# Altium PCB MB1137.PcbDoc (part 4 of 4)
Units mm, origin at the board's own origin, x right, y up, seen from the top; angles counter-clockwise.
Board outline 70.13 x 133.47 mm, 6 copper layers (Top Layer, GND, Signal, PWR, GND (Mid2), Bottom Layer), stack 1.893 mm thick; 293 components, 281 nets, 1134 pads, 921 vias.
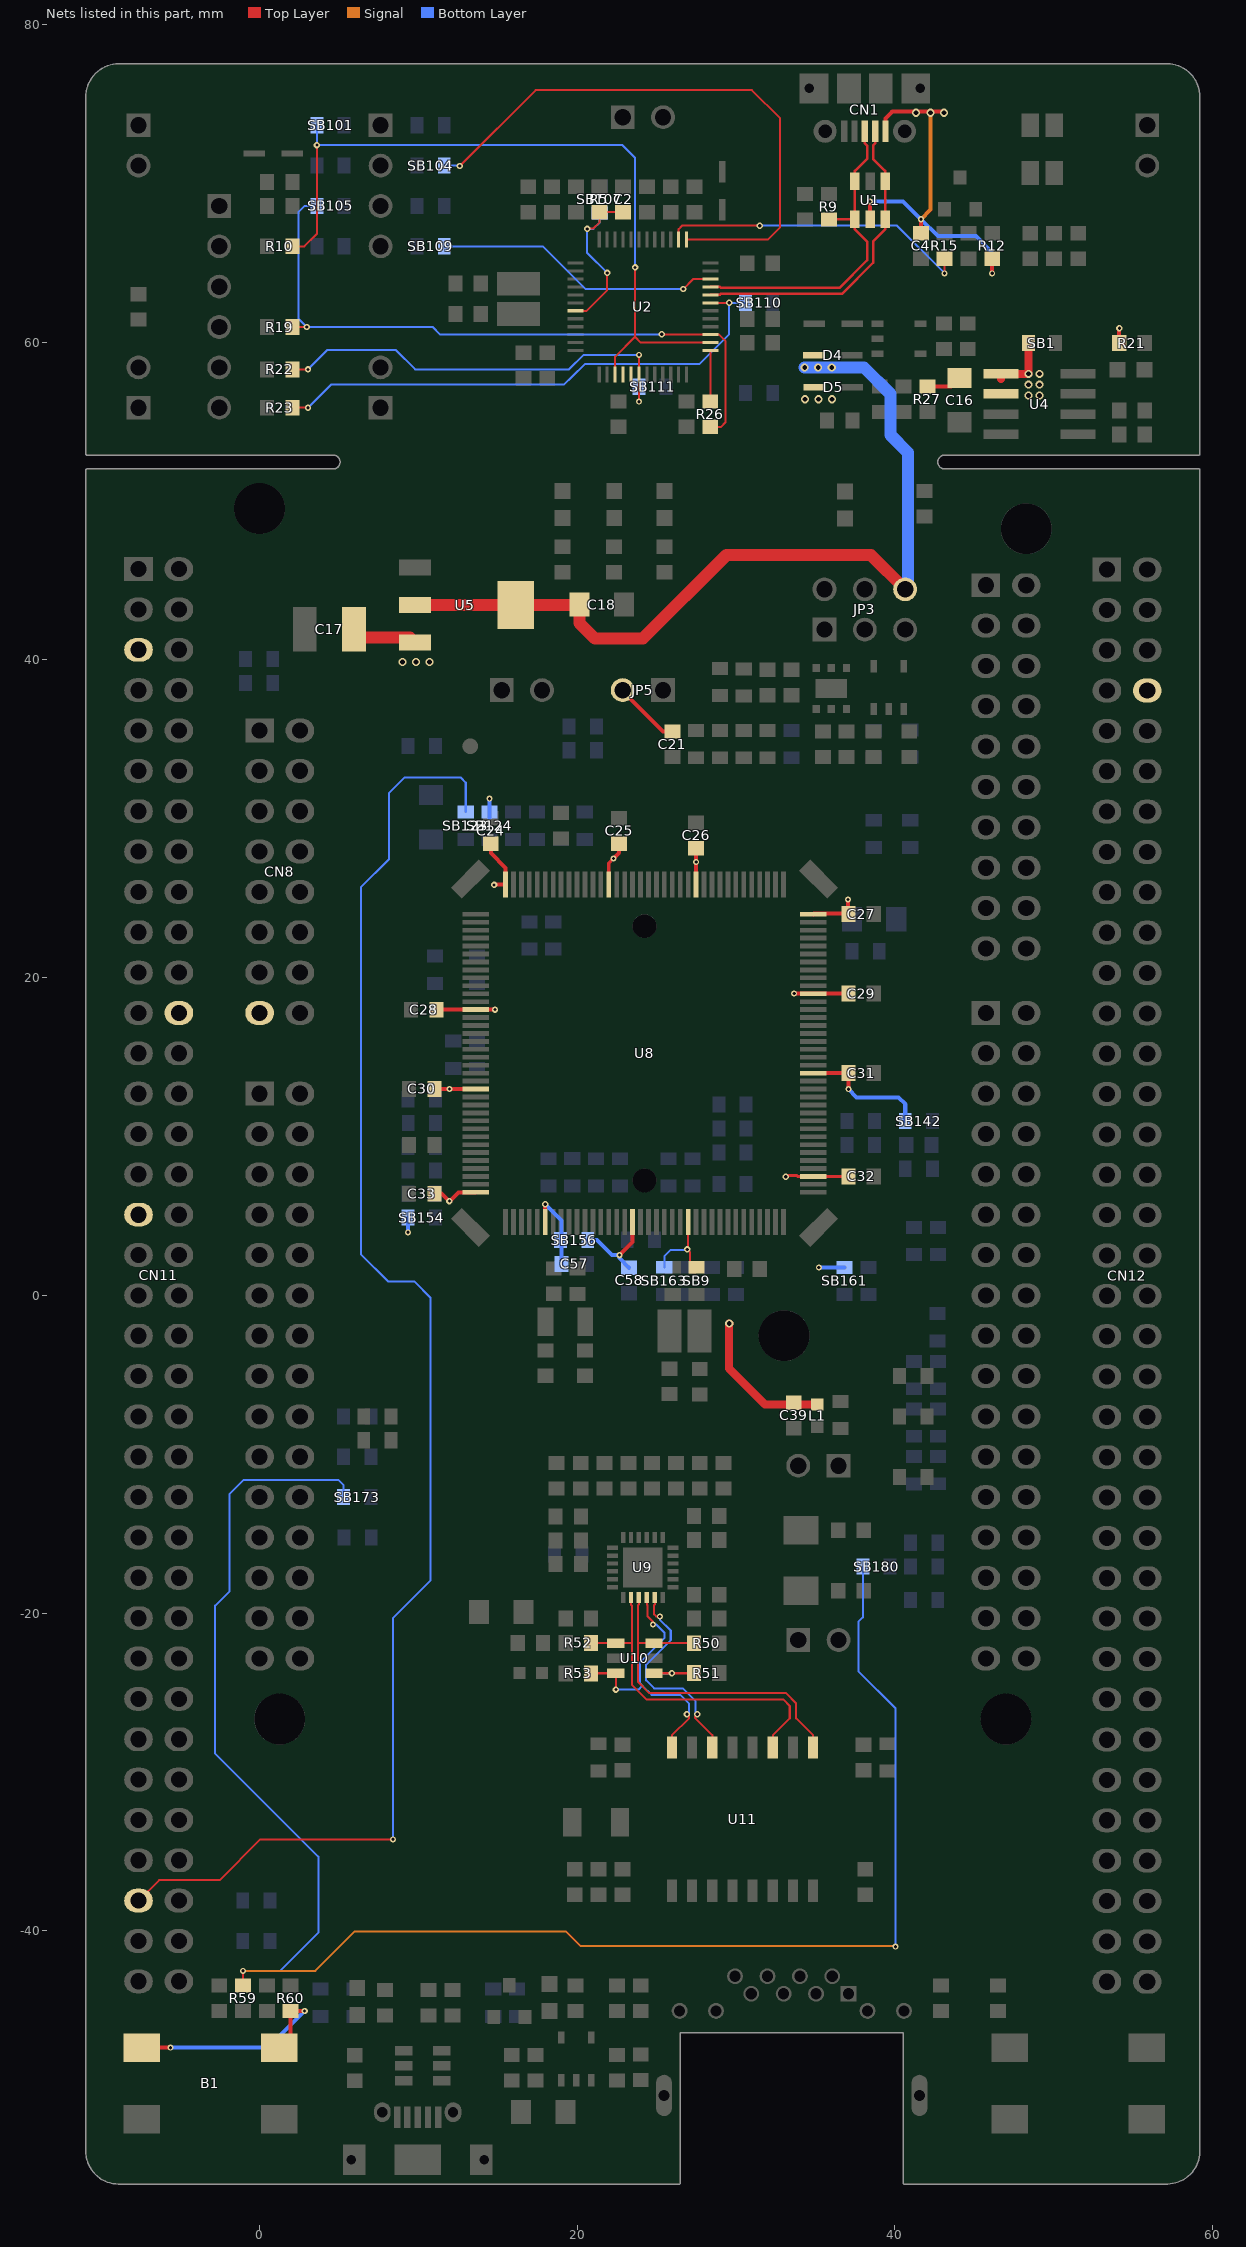
[diagram p8: the nets of this part, all layers, seen from the top]

## Via types
v1: diameter 0.406, hole 0.203, Top Layer to Bottom Layer, tented both sides, 464 vias
v2: diameter 0.381, hole 0.203, Top Layer to Bottom Layer, tented both sides, 415 vias
v3: diameter 0.508, hole 0.305, Top Layer to Bottom Layer, tented both sides, 39 vias
v4: diameter 0.66, hole 0.33, Top Layer to Bottom Layer, tented both sides, 2 vias
v5: diameter 0.381, hole 0.203, Top Layer to Bottom Layer, 1 vias

## Nets (pads, with @x,y where several pads share a name; then routed paths per layer and width w, separated by ;. In a path a pad name is that pad's centre, name@x,y a point inside that pad or via, vN(x,y) a via of type N, cw(c..) or ccw(c..) an arc to the next point about the centre after c; other vN are vias at no path point) (continued)
PH1: SB9.2 SB163.1 U8.24 | length 5.4
  Top Layer w0.127: v1(26.924,2.896) 27.102,2.718 27.102,2.076 SB9.2@27.483,1.695 ; v1@26.961,2.933 U8.24@26.961,4.594
  Bottom Layer w0.127: SB163.1@25.476,1.772 25.476,2.464 25.883,2.87 v1@26.949,2.87
PH2: CN11.67 SB123.2 | length 95.2
  Top Layer w0.127: CN11.67@-7.62,-38.1 -6.325,-36.805 -2.515,-36.805 0.051,-34.239 v2(8.407,-34.239)
  Bottom Layer w0.127: v2(8.407,-34.239) 8.407,-20.295 10.77,-17.932 10.77,-0.165 9.724,0.881 8.083,0.881 6.375,2.588 6.375,25.679 8.134,27.438 8.134,31.604 9.144,32.614 12.649,32.614 12.979,32.283 SB123.2@12.979,30.423
RD_N: R53.1 U9.22 U10.6 U11.8 | length 17.9
  Top Layer w0.13: R53.1@20.881,-23.785 U10.6@22.43,-23.785 v1(22.43,-24.814) ; U9.22@24.38,-19.028 24.38,-19.46 24.427,-19.507 24.427,-20.216 24.765,-20.555 v2(24.765,-20.708) ; U11.8@25.959,-28.459 25.959,-27.69 27.038,-26.61 27.038,-26.505 v1(26.899,-26.365)
  Bottom Layer w0.13: v1(22.43,-24.814) 23.852,-24.814 24.1,-24.566 ; v2(24.765,-20.708) 24.957,-20.708 25.502,-21.253 25.502,-21.539 23.952,-23.089 23.952,-24.419 24.1,-24.566 ; v1(26.899,-26.365) 27.024,-26.24 27.024,-25.683 26.487,-25.146 24.68,-25.146 24.1,-24.566
RD_P: R51.1 U9.23 U10.1 U11.6 | length 17.7
  Top Layer w0.127: R51.1@27.333,-23.785 R51.1@27.343,-23.774
  Top Layer w0.13: U10.1@24.83,-23.785 v1(25.959,-23.785) R51.1@27.333,-23.785 ; U9.23@24.88,-19.028 24.88,-19.46 24.82,-19.52 24.82,-20.053 24.969,-20.202 25.18,-20.202 v2(25.197,-20.218) ; v1(27.559,-26.365) 27.419,-26.505 27.419,-26.61 28.499,-27.69 U11.6@28.499,-28.459
  Bottom Layer w0.127: 24.333,-23.774 24.343,-23.785
  Bottom Layer w0.13: 24.343,-23.785 v1(25.959,-23.785) ; v2(25.197,-20.218) 25.197,-20.41 25.883,-21.096 25.883,-21.697 24.333,-23.246 24.333,-23.774 24.333,-24.232 24.837,-24.736 26.645,-24.736 27.434,-25.525 27.434,-26.24 v1(27.559,-26.365)
STLINK_USB_DM: CN1.2 U1.1 U1.6 U2.32 | length 20
  Top Layer w0.155: U2.32@28.38,62.98 28.975,62.98 29.034,63.039 36.654,63.039 38.621,65.006 38.621,66.344 39.38,67.103 U1.6@39.38,67.736 U1.1@39.38,70.136 39.38,70.786 38.621,71.545 38.621,72.384 38.75,72.513 CN1.2@38.75,73.279
STLINK_USB_DP: CN1.3 R9.1 U1.3 U1.4 U2.33 | length 21.1
  Top Layer w0.155: U2.33@28.38,63.48 28.975,63.48 29.034,63.42 36.496,63.42 38.24,65.164 38.24,66.343 37.48,67.103 U1.4@37.48,67.736 ; R9.1@35.839,67.729 37.474,67.729 U1.4@37.48,67.736 ; CN1.3@38.1,73.279 38.1,72.513 38.24,72.373 38.24,71.546 37.48,70.786 U1.3@37.48,70.136 U1.4@37.48,67.736
STM_JTCK: SB104.2 U2.37 | length 36.9
  Top Layer w0.127: v1(12.598,71.095) 17.374,75.87 30.988,75.87 32.766,74.092 32.766,67.234 32.012,66.48 U2.37@26.88,66.48
  Bottom Layer w0.127: SB104.2@11.627,71.12 12.573,71.12 v1(12.598,71.095)
STM_JTMS: SB109.2 U2.34 | length 18.2
  Top Layer w0.127: v2@26.594,63.348 v2(26.67,63.348) 27.302,63.98 U2.34@28.38,63.98
  Bottom Layer w0.127: SB109.2@11.627,66.04 17.831,66.04 20.523,63.348 v2(26.67,63.348)
STM_RST: C2.2 R5.1 SB107.2 U2.7 | length 11.5
  Top Layer w0.127: U2.7@19.88,61.979 20.585,61.979 21.88,63.274 v1(21.88,64.364) ; v1@20.625,67.171 21.022,67.171 21.387,67.536 R5.1@21.387,68.186 C2.2@22.885,68.186
  Bottom Layer w0.127: SB107.2@21.412,68.129 21.412,67.539 21.006,67.132 v1(20.625,67.132) 20.625,65.619 v1(21.88,64.364)
T_JTCK: R10.2 SB101.1 U2.15 U2.26 | length 48.1
  Top Layer w0.127: R10.2@2.07,66.04 2.826,66.04 3.613,66.827 v1(3.613,72.415) ; U2.15@22.38,57.98 U2.15@22.38,57.98 22.38,59.092 23.635,60.348 ; v1(23.635,64.71) 23.635,60.348 ; U2.26@28.38,59.98 24.003,59.98 23.635,60.348
  Bottom Layer w0.127: SB101.1@3.613,73.66 v1(3.613,72.415) 22.835,72.415 23.635,71.615 v1(23.635,64.71)
T_JTDI: U2.17
T_JTDO: U2.16
T_JTMS: R19.2 R26.2 SB105.1 U2.27 | length 42.6
  Top Layer w0.127: R19.2@2.07,60.96 v1(2.972,60.96) ; v1@25.347,60.48 U2.27@28.38,60.48 28.929,60.48 29.324,60.085 29.324,54.948 29.05,54.674 R26.2@28.372,54.674
  Bottom Layer w0.127: SB105.1@3.613,68.58 2.845,68.58 2.438,68.174 2.438,61.493 v1(2.972,60.96) 10.897,60.96 11.377,60.48 v1@25.347,60.48
  other v1: 25.324,60.503
T_NRST: R22.2 SB111.1 U2.18 | length 27.2
  Top Layer w0.127: R22.2@2.07,58.293 v1@3.047,58.293 ; v2(23.88,56.261) U2.18@23.88,57.98 v2(23.88,59.207)
  Bottom Layer w0.127: v1@2.946,58.292 v1(3.048,58.292) ; v1@3.097,58.292 v1(3.048,58.292) ; v2(23.88,56.261) 23.882,56.263 SB111.1@23.882,57.201 ; v2(23.88,59.207) 20.396,59.207 19.48,58.292 9.789,58.292 8.559,59.522 4.279,59.522 v1(3.048,58.292)
T_SWDIO_IN: R26.1 U2.25 | length 3.2
  Top Layer w0.127: R26.1@28.38,56.282 U2.25@28.38,59.48
T_SWO: R23.2 SB110.1 U2.31 | length 33.6
  Top Layer w0.127: R23.2@2.07,55.88 v1(3.048,55.88) ; U2.31@28.38,62.48 v1@29.587,62.48
  Bottom Layer w0.127: v1(3.048,55.88) 4.497,57.329 19.159,57.329 19.677,57.846 19.695,57.846 20.472,58.623 27.686,58.623 29.566,60.503 v1(29.566,62.484) 29.566,62.501 29.587,62.48 29.591,62.484 SB110.1@30.588,62.484
TD_N: R52.1 U9.20 U10.4 U11.3 | length 21.6
  Top Layer w0.13: R52.1@20.866,-21.869 22.43,-21.869 23.424,-21.869 ; U9.20@23.38,-19.028 23.38,-19.46 23.44,-19.52 23.44,-24.512 24.353,-25.425 32.953,-25.425 33.376,-25.848 33.376,-26.623 32.309,-27.69 U11.3@32.309,-28.459
TD_P: R50.1 U9.21 U10.3 U11.1 | length 22.6
  Top Layer w0.13: 23.846,-21.895 24.83,-21.895 24.84,-21.895 R50.1@27.343,-21.895 ; U9.21@23.88,-19.028 23.88,-19.46 23.821,-19.52 23.821,-24.328 24.511,-25.019 33.111,-25.019 33.782,-25.69 33.782,-26.623 34.849,-27.69 U11.1@34.849,-28.459
  Top Layer w0.152: U10.3@24.83,-21.885 U10.3@24.84,-21.895
U5V: C4.2 C16.1 CN1.1 CN12.8 D5.1 R12.2 R21.1 R27.1 SB1.1 U1.5 U4.1 U4.2 | length 32
  Top Layer w0.254: U1.5@38.43,67.736 v2(38.43,68.859) ; CN1.1@39.4,73.279 39.4,74.096 39.827,74.524 v3@43.078,74.524 ; C4.2@41.631,66.865 v2(41.631,67.742) ; R27.1@42.037,57.213 43.523,57.213 C16.1@44.069,57.76 ; v2(46.119,64.338) R12.2@46.119,65.265 ; R21.1@54.115,59.944 v1@54.115,60.871
  Top Layer w0.508: 46.673,57.683 U4.1@46.673,58.014 48.393,58.014 SB1.1@48.393,59.944
  Signal w0.254: v2(41.631,67.742) 42.24,68.351 v3(42.24,74.447)
  Bottom Layer w0.254: v2(38.43,68.859) 40.513,68.859 v2(41.631,67.742) 42.697,66.675 45.085,66.675 46.119,65.641 v2@46.119,64.447 ; v3(43.078,74.447) v3@43.078,74.524
  other v1: 54.127,60.884
  other v3: 34.341,56.413 35.192,56.413 36.043,56.413 48.412,56.642 49.098,56.642 48.412,57.328 49.098,57.328 48.412,58.014 49.098,58.014 41.326,74.447
USB_RENUMN: R15.2 U2.38 | length 19.6
  Top Layer w0.127: U2.38@26.38,66.48 26.38,67.122 26.594,67.335 v1(31.49,67.335) ; v2(43.122,64.338) R15.2@43.122,65.265
  Bottom Layer w0.127: v1(31.49,67.335) 40.124,67.335 v2(43.122,64.338)
USR_BUT: R59.2 SB173.2 SB180.1 | length 113.3
  Top Layer w0.127: R59.2@-1.041,-43.447 v2(-1.041,-42.52)
  Signal w0.127: v2(-1.041,-42.52) 3.505,-42.52 5.969,-40.056 19.304,-40.056 20.218,-40.97 40.005,-40.97 v2(40.03,-40.996)
  Bottom Layer w0.127: v2(-1.041,-42.52) 1.295,-42.52 3.696,-40.119 3.696,-35.331 -2.794,-28.842 -2.794,-19.533 -1.88,-18.618 -1.88,-12.497 -1.015,-11.632 4.978,-11.632 5.29,-11.944 SB173.2@5.29,-12.7 ; SB180.1@37.979,-17.069 37.979,-20.263 37.694,-20.549 37.694,-23.647 40.03,-25.984 v2(40.03,-40.996)
VBAT: C57.1 CN11.33 SB156.2 U8.6 | length 5.3
  Top Layer w0.254: U8.6@17.982,4.615 v1(17.982,5.744)
  Bottom Layer w0.254: v1(17.982,5.744) 19.004,4.721 C57.1@19.004,1.981
VDD: B1.2 B1.3 C21.1 C24.1 C25.1 C26.1 C27.1 C28.1 C29.1 C30.1 C31.1 C32.1 C33.1 C39.1 C58.1 CN11.5 JP5.2 L1.1 R60.1 SB124.2 SB142.2 SB154.2 SB156.1 SB161.1 U8.17 U8.39 U8.52 U8.62 U8.72 U8.84 U8.95 U8.108 U8.121 U8.131 U8.144 | length 75.1
  Top Layer w0.203: U8.95@21.982,25.865 21.982,27.214 v2(22.276,27.508) ; v1(33.122,7.468) 33.203,7.549 33.813,7.549 33.872,7.49 U8.39@34.857,7.49 34.86,7.493 C32.1@37.071,7.493
  Top Layer w0.254: B1.2@-7.424,-47.356 v2(-5.603,-47.356) ; B1.3@1.226,-47.356 1.956,-46.627 R60.1@1.956,-45.047 v1(2.832,-45.047) ; C33.1@11.011,6.401 11.466,6.401 11.949,5.918 12.52,6.49 U8.144@13.607,6.49 ; C30.1@11.026,12.99 v2(11.953,12.99) U8.131@13.607,12.99 ; C28.1@11.151,17.983 v1@14.813,17.983 ; C24.1@14.554,28.435 14.554,27.838 15.482,26.91 U8.108@15.482,25.865 14.791,25.865 v1(14.762,25.837) ; v2(22.276,27.508) 22.631,27.864 C25.1@22.631,28.435 ; v1(22.657,2.54) 23.482,3.365 U8.17@23.482,4.615 ; JP5.2@22.86,38.1 22.86,38.042 25.406,35.496 C21.1@25.984,35.496 ; U8.84@27.482,25.865 27.482,27.507 27.483,27.508 C26.1@27.483,28.156 C26.1@27.483,28.435 ; v2(33.655,18.999) C29.1@37.071,18.999 C29.1@37.062,18.99 ; U8.52@34.857,13.99 37.066,13.99 C31.1@37.071,13.995 v2(37.071,12.979) ; U8.72@34.857,23.99 34.9,24.034 C27.1@37.041,24.034 ; v2(37.033,24.917) 37.033,24.041 C27.1@37.041,24.034 ; C32.1@37.068,7.49 C32.1@37.071,7.493 ; C27.1@37.071,24.003 C27.1@37.041,24.034
  Top Layer w0.508: v3(29.566,-1.778) 29.548,-1.778 29.548,-4.6 31.819,-6.871 L1.1@35.103,-6.871
  Bottom Layer w0.254: v2(-5.603,-47.356) 0.523,-47.356 v1(2.832,-45.047) ; v2(9.352,3.971) SB154.2@9.352,4.898 ; SB124.2@14.478,30.093 SB124.2@14.478,30.423 v2(14.478,31.267) ; SB156.1@20.662,3.48 21.234,3.48 22.174,2.54 v1(22.657,2.54) 22.657,2.349 C58.1@23.266,1.74 ; v2(35.204,1.753) 35.216,1.764 SB161.1@36.83,1.764 ; v2(37.071,12.979) 37.579,12.471 40.208,12.471 40.646,12.033 SB142.2@40.646,10.973
  other v1: 11.949,5.936 14.82,17.99
  other v2: 27.483,27.28
VIN: C17.1 CN8.15 CN11.24 U5.3 | length 5.1
  Top Layer w0.508: C17.1@5.944,40.996 C17.1@5.944,41.935
  Top Layer w0.762: C17.1@5.944,41.935 6.478,41.402 9.474,41.402 U5.3@9.779,41.097
  other v3: 8.998,39.878 9.849,39.878 10.7,39.878
VIN_5V: C18.1 D4.1 JP3.6 U5.2 U5.4 | length 54.4
  Top Layer w0.508: C18.1@20.117,43.459 C18.1@20.142,43.485
  Top Layer w0.762: U5.2@9.779,43.459 U5.4@16.129,43.459 C18.1@20.117,43.459 ; C18.1@20.142,43.485 20.142,42.316 21.107,41.351 24.13,41.351 29.388,46.609 38.481,46.609 JP3.6@40.64,44.45
  Bottom Layer w0.762: v3(34.315,58.42) v3(35.166,58.42) v3(36.017,58.42) 38.042,58.42 39.713,56.749 39.713,54.159 40.808,53.064 40.808,44.618 JP3.6@40.64,44.45
pads on no net: CN1.11 CN8.1 CN11.10 CN11.26 U2.4 U2.11 U2.14 U2.19 U2.22 U2.40 U2.41 U2.42 U2.43 U2.45 U2.46 U6.3 U6.5 U8.0 U11.4 U11.5 U11.12 U11.13

## Polygon pours and split planes (outlines as drawn)
GND on Bottom Layer "GND" (solid, remove dead copper, pour order 26): -10.87,-53.88 ccw(c-8.87,-53.88) -8.87,-55.88 -8.87,-55.881 1.219,-55.881 26.503,-55.881 57.126,-55.881 ccw(c57.126,-53.881) 59.126,-53.881 59.126,-53.876 59.13,-53.876 59.13,75.46 ccw(c57.13,75.46) 57.13,77.46 -8.87,77.46 ccw(c-8.87,75.46) -10.87,75.46 -10.87,-53.88
GND on Signal "GND" (solid, remove dead copper, pour order 27): -10.87,-53.88 ccw(c-8.87,-53.88) -8.87,-55.88 -8.87,-55.881 1.219,-55.881 26.503,-55.881 57.126,-55.881 ccw(c57.126,-53.881) 59.126,-53.881 59.126,-53.876 59.13,-53.876 59.13,75.46 ccw(c57.13,75.46) 57.13,77.46 -8.87,77.46 ccw(c-8.87,75.46) -10.87,75.46 -10.87,-53.88
GND on Top Layer "GND" (solid, remove dead copper, pour order 28): -10.87,-53.88 ccw(c-8.87,-53.88) -8.87,-55.88 -8.87,-55.881 1.219,-55.881 26.503,-55.881 57.126,-55.881 ccw(c57.126,-53.881) 59.126,-53.881 59.126,-53.876 59.13,-53.876 59.13,75.46 ccw(c57.13,75.46) 57.13,77.46 -8.87,77.46 ccw(c-8.87,75.46) -10.87,75.46 -10.87,-53.88
GND on GND (Mid2) "GND" (solid, remove dead copper, pour order 21): -10.87,-53.88 ccw(c-8.87,-53.88) -8.87,-55.88 -8.87,-55.881 1.219,-55.881 26.503,-55.881 57.126,-55.881 ccw(c57.126,-53.881) 59.126,-53.881 59.126,-53.876 59.13,-53.876 59.13,75.46 ccw(c57.13,75.46) 57.13,77.46 -8.87,77.46 ccw(c-8.87,75.46) -10.87,75.46 -10.87,-53.88
+5V on PWR "5V" (solid, remove dead copper, pour order 37): 42.311,42.777 cw(c42.311,41.836) 43.251,41.836 43.251,-7.523 cw(c42.672,-7.523) 42.672,-8.103 32.472,-8.099 ccw(c32.472,-8.546) 32.025,-8.546 32.024,-16.845 cw(c31.348,-16.845) 31.348,-17.521 17.896,-17.508 ccw(c17.896,-18.175) 17.229,-18.175 17.276,-55.757 cw(c17.175,-55.757) 17.175,-55.859 12.47,-55.856 cw(c12.47,-55.678) 12.292,-55.678 12.209,-15.272 cw(c12.758,-15.272) 12.758,-14.724 29.949,-14.723 ccw(c29.949,-13.973) 30.7,-13.973 30.691,-6.922 cw(c31.357,-6.922) 31.357,-6.257 40.168,-6.254 ccw(c40.168,-5.802) 40.62,-5.802 40.615,38.577 ccw(c39.692,38.577) 39.692,39.499 39.692,39.506 11.868,39.506 cw(c11.868,39.535) 11.84,39.535 11.84,40.459 ccw(c11.276,40.459) 11.276,41.023 8.587,41.023 ccw(c8.587,40.384) 7.948,40.384 7.948,22.051 cw(c7.593,22.051) 7.593,21.696 -5.811,21.696 cw(c-5.811,22.149) -6.264,22.149 -6.264,25.758 cw(c-5.612,25.758) -5.612,26.41 3.619,26.41 ccw(c3.619,26.741) 3.95,26.741 3.95,42.662 cw(c5.962,42.662) 5.962,44.674 28.118,44.674 cw(c28.118,44.221) 28.571,44.221 28.571,43.201 ccw(c29.004,43.201) 29.004,42.768 29.004,42.777
AVDD on PWR "AVDD" (solid, remove dead copper, pour order 23): 32.766,-8.271 32.523,-8.271 ccw(c32.523,-8.637) 32.156,-8.637 32.147,-11.269 ccw(c32.267,-11.269) 32.267,-11.389 46.437,-11.408 ccw(c46.437,-10.877) 46.968,-10.877 46.965,13.294 ccw(c46.333,13.294) 46.333,13.926 45.167,13.926 cw(c45.167,14.14) 44.952,14.14 44.952,16.426 cw(c45.212,16.426) 45.212,16.686 58.236,16.686 ccw(c58.236,17.242) 58.793,17.242 58.793,33.943 ccw(c58.471,33.943) 58.471,34.265 54.959,34.265 cw(c54.959,34.823) 54.4,34.823 54.4,38.92 ccw(c53.924,38.92) 53.924,39.395 52.353,39.395 cw(c52.353,40.237) 51.512,40.237 51.512,40.363 ccw(c50.956,40.363) 50.956,40.919 44.03,40.919 ccw(c44.03,40.422) 43.534,40.422 43.534,-7.467 cw(c42.695,-7.467) 42.695,-8.306 32.33,-8.306 ccw(c32.33,-8.368) 32.269,-8.368
AGND on PWR "AGND" (solid, remove dead copper, pour order 25): 45.878,16.571 45.369,16.571 ccw(c45.369,16.364) 45.161,16.364 45.161,14.201 ccw(c45.291,14.201) 45.291,14.072 46.59,14.072 cw(c46.59,13.545) 47.117,13.545 47.117,-11.024 cw(c46.66,-11.024) 46.66,-11.481 33.266,-11.481 ccw(c33.266,-12.393) 32.354,-12.393 32.354,-16.497 ccw(c33.231,-16.497) 33.231,-17.374 39.903,-17.374 cw(c39.903,-17.856) 40.386,-17.856 40.386,-55.067 ccw(c41.199,-55.067) 41.199,-55.88 57.212,-55.88 ccw(c57.212,-53.902) 59.19,-53.902 59.19,15.41 ccw(c58.039,15.41) 58.039,16.561
AVDD on PWR "AVDD" (solid, remove dead copper, pour order 22): 44.249,40.982 50.867,40.982 cw(c50.867,40.337) 51.511,40.337 ccw(c52.377,40.337) 52.377,39.472 52.476,39.472 54.05,39.472 cw(c54.05,39.14) 54.381,39.14 54.381,34.976 ccw(c55.016,34.976) 55.016,34.341 58.41,34.341 cw(c58.41,33.96) 58.791,33.96 58.791,17.242 cw(c58.236,17.242) 58.236,16.688 44.182,16.688 cw(c44.182,17.334) 43.536,17.334 43.536,40.564 cw(c43.942,40.564) 43.942,40.97
NetC44_2 on PWR "RMII" (solid, remove dead copper, pour order 36): 39.566,-17.806 cw(c39.566,-18.498) 40.259,-18.498 40.236,-31.32 cw(c39.448,-31.32) 39.448,-32.108 18.352,-32.093 cw(c18.352,-31.355) 17.615,-31.355 17.604,-18.088 cw(c17.859,-18.088) 17.859,-17.832
VIN on PWR "VIN" (solid, remove dead copper, pour order 34): 5.823,21.418 -5.619,21.418 ccw(c-5.619,20.777) -6.26,20.777 -6.26,16.013 ccw(c-5.791,16.013) -5.791,15.545 9.975,15.545 ccw(c9.975,17.152) 11.582,17.152 11.582,40.44 ccw(c11.256,40.44) 11.256,40.767 8.585,40.767 ccw(c8.585,40.386) 8.204,40.386 8.204,21.895 cw(c7.722,21.895) 7.722,21.412
NetC11_2 on PWR "VIN_2" (solid, remove dead copper, pour order 30): 53.483,60.332 ccw(c53.262,60.332) 53.262,60.554 37.465,60.554 ccw(c37.465,60.198) 37.109,60.198 37.109,59.778 cw(c36.881,59.778) 36.881,59.549 30.335,59.549 ccw(c30.335,58.979) 29.764,58.979 29.764,51.043 ccw(c30.226,51.043) 30.226,50.581 36.628,50.581 cw(c36.628,50.303) 36.906,50.303 36.917,43.322 ccw(c37.226,43.322) 37.226,43.013 38.911,43.007 ccw(c38.911,43.512) 39.416,43.512 39.421,51.295 ccw(c39.08,51.295) 39.08,51.635 31.629,51.635 cw(c31.629,52.048) 31.217,52.048 31.217,52.757 cw(c31.744,52.757) 31.744,53.284 33.01,53.284 ccw(c33.01,53.631) 33.357,53.631 33.357,56.86 cw(c33.788,56.86) 33.788,57.291 46.71,57.291 ccw(c46.71,57.556) 46.975,57.556 46.975,58.106 cw(c47.578,58.106) 47.578,58.709 53.111,58.709 ccw(c53.111,59.08) 53.482,59.08
E5V on PWR "E5V" (solid, remove dead copper, pour order 24): 36.601,61.824 cw(c36.601,61.671) 36.754,61.671 36.754,59.849 cw(c36.696,59.849) 36.696,59.792 30.095,59.795 ccw(c30.095,59.262) 29.562,59.262 29.55,50.951 ccw(c30.123,50.951) 30.123,50.378 36.365,50.39 cw(c36.365,50.107) 36.648,50.107 36.643,43.465 cw(c36.241,43.465) 36.241,43.062 33.756,43.071 cw(c33.756,43.358) 33.469,43.358 33.477,47.346 ccw(c33.045,47.346) 33.045,47.777 3.505,47.777 ccw(c3.505,46.914) 2.642,46.914 cw(c2.286,46.914) 2.286,46.558 -2.076,46.558 ccw(c-2.076,46.226) -2.408,46.226 -2.408,39.177 cw(c-2.769,39.177) -2.769,38.816 -6.333,38.816 cw(c-6.333,39.113) -6.629,39.113 -6.629,51.102 cw(c-6.096,51.102) -6.096,51.636 27.277,51.636 ccw(c27.277,52.121) 27.762,52.121 27.762,61.348 cw(c28.238,61.348) 28.238,61.824 39.418,61.824 cw(c39.418,61.617) 39.624,61.617
+3V3 on PWR "3V3" (solid, remove dead copper, pour order 33): -6.304,36.431 -6.309,36.431 -6.309,37.287 -6.309,38.142 cw(c-5.947,38.142) -5.947,38.504 -2.436,38.504 ccw(c-2.436,38.875) -2.065,38.875 -2.065,45.759 cw(c-1.546,45.759) -1.546,46.277 2.68,46.277 ccw(c2.68,46.638) 3.041,46.638 3.041,46.933 cw(c3.632,46.933) 3.632,47.523 33.058,47.523 cw(c33.058,47.361) 33.22,47.361 33.22,43.203 cw(c33.045,43.203) 33.045,43.028 29.004,43.028 cw(c29.004,43.205) 28.826,43.205 28.826,44.73 ccw(c28.626,44.73) 28.626,44.931 5.922,44.931 ccw(c5.922,42.621) 3.613,42.621 3.613,27.286 cw(c3.152,27.286) 3.152,26.825 -5.895,26.825 cw(c-5.895,27.229) -6.299,27.229 -6.299,36.855
VBAT on PWR "VBAT" (solid, remove dead copper, pour order 32): -10.539,5.69 -10.539,5.828 cw(c-10.245,5.828) -10.245,6.121 5.462,6.121 cw(c5.462,4.802) 6.782,4.802 6.782,3.874 ccw(c7.607,3.874) 7.607,3.048 14.466,3.048 ccw(c14.466,3.759) 15.177,3.759 15.177,5.804 cw(c15.951,5.804) 15.951,6.579 18.147,6.579 cw(c18.147,6.325) 18.401,6.325 18.401,0.909 cw(c17.618,0.909) 17.618,0.127 -9.957,0.127 cw(c-9.957,0.711) -10.541,0.711
+3V3_ST_LINK on PWR "ST_3V3" (solid, remove dead copper, pour order 31): -8.509,77.14 -8.966,77.14 ccw(c-8.966,75.565) -10.541,75.565 -10.541,53.518 ccw(c-10.312,53.518) -10.312,53.289 27.445,53.289 ccw(c27.445,53.454) 27.61,53.454 27.61,61.426 cw(c28.185,61.426) 28.185,62.001 36.671,62.001 cw(c36.671,61.683) 36.99,61.683 36.99,60.876 ccw(c37.16,60.876) 37.16,60.706 53.24,60.706 ccw(c53.24,60.935) 53.469,60.935 53.469,68.936 ccw(c50.929,68.936) 50.929,71.476 50.698,71.476 37.795,71.476 cw(c37.795,71.933) 37.338,71.933 37.338,76.76 ccw(c36.957,76.76) 36.957,77.141 -8.509,77.141
U5V on PWR "U5V" (solid, remove dead copper, pour order 35): 34.928,57.099 33.922,57.099 ccw(c33.922,56.744) 33.567,56.744 33.567,53.614 ccw(c33.917,53.614) 33.917,53.264 39.288,53.264 cw(c39.288,52.979) 39.573,52.979 39.575,43.258 ccw(c39.829,43.258) 39.829,43.004 42.837,42.989 cw(c42.837,42.253) 43.574,42.253 43.561,41.554 ccw(c43.942,41.554) 43.942,41.173 50.952,41.173 cw(c50.952,40.361) 51.765,40.361 51.765,40.31 ccw(c52.426,40.31) 52.426,39.649 54.077,39.649 cw(c54.077,39.091) 54.636,39.091 54.636,35.091 ccw(c55.183,35.091) 55.183,34.544 58.42,34.544 ccw(c58.42,34.9) 58.776,34.9 58.776,51.475 ccw(c58.62,51.475) 58.62,51.631 42.982,51.631 cw(c42.982,51.943) 42.67,51.943 42.67,53.084 cw(c42.799,53.084) 42.799,53.213 58.547,53.213 ccw(c58.547,53.492) 58.826,53.492 58.826,75.59 ccw(c57.252,75.59) 57.252,77.165 38.008,77.165 ccw(c38.008,76.708) 37.55,76.708 37.55,72.254 ccw(c38.151,72.254) 38.151,71.653 51.357,71.653 cw(c51.357,69.188) 53.823,69.188 53.823,58.931 cw(c53.362,58.931) 53.362,58.471 47.668,58.471 ccw(c47.668,58.191) 47.389,58.191 47.389,57.599 cw(c46.888,57.599) 46.888,57.099
NetC51_2 on PWR "RMII_2" (solid, remove dead copper, pour order 38): 18.29,-32.512 39.484,-32.499 cw(c39.484,-33.236) 40.221,-33.236 40.264,-55.247 cw(c39.728,-55.247) 39.728,-55.783 18.369,-55.746 cw(c18.369,-55.164) 17.787,-55.164 17.763,-32.753 cw(c17.996,-32.753) 17.996,-32.52
VDD on PWR "VDD" (solid, remove dead copper, pour order 40): -10.551,-20.705 -10.541,-20.705 -10.541,-20.904 -10.541,-54 ccw(c-8.966,-54) -8.966,-55.575 8.407,-55.575 ccw(c8.407,-55.22) 8.763,-55.22 8.763,-9.345 cw(c9.713,-9.345) 9.713,-8.395 26.479,-8.395 ccw(c26.479,-6.83) 28.043,-6.83 28.043,-5.178 cw(c28.956,-5.178) 28.956,-4.265 36.681,-4.265 ccw(c36.681,-3.25) 37.696,-3.25 37.696,35.991 ccw(c36.83,35.991) 36.83,36.857 24.498,36.857 cw(c24.498,37.389) 23.967,37.389 23.967,38.964 ccw(c23.682,38.964) 23.682,39.249 12.247,39.249 ccw(c12.247,38.921) 11.919,38.921 11.919,16.57 cw(c10.545,16.57) 10.545,15.197 -5.875,15.197 cw(c-5.875,15.773) -6.452,15.773 -6.452,51.171 ccw(c-6.921,51.171) -6.921,51.641 -10.008,51.641 ccw(c-10.008,51.104) -10.545,51.104 -10.545,7.061 ccw(c-9.882,7.061) -9.882,6.399 5.719,6.399 cw(c5.719,4.877) 7.241,4.877 7.241,3.831 ccw(c7.696,3.831) 7.696,3.376 14.294,3.376 ccw(c14.294,3.935) 14.853,3.935 14.853,6.194 cw(c15.646,6.194) 15.646,6.987 18.106,6.987 cw(c18.106,6.402) 18.692,6.402 18.692,0.776 cw(c17.695,0.776) 17.695,-0.221 -9.771,-0.221 ccw(c-9.771,-0.996) -10.546,-0.996 -10.546,-20.904
+3V3_PER on PWR "3V3" (solid, remove dead copper, pour order 39): 12.06,-46.203 12.055,-55.782 cw(c11.916,-55.782) 11.916,-55.921 9.289,-55.921 cw(c9.289,-55.608) 8.976,-55.608 8.966,-9.787 cw(c10.262,-9.787) 10.262,-8.491 27.322,-8.491 ccw(c27.322,-7.703) 28.11,-7.703 28.11,-5.297 cw(c29.013,-5.297) 29.013,-4.394 37.135,-4.394 ccw(c37.135,-3.734) 37.795,-3.734 37.795,36.048 ccw(c36.785,36.048) 36.785,37.059 26.884,37.044 cw(c26.884,37.527) 26.402,37.527 26.397,38.972 ccw(c26.374,38.972) 26.374,38.996 26.382,38.998 cw(c26.585,38.998) 26.585,39.201 39.243,39.192 cw(c39.243,38.125) 40.31,38.125 40.31,-5.621 cw(c39.98,-5.621) 39.98,-5.951 31.233,-5.951 ccw(c31.233,-6.705) 30.48,-6.705 30.474,-13.461 cw(c29.54,-13.461) 29.54,-14.396 12.746,-14.387 ccw(c12.746,-15.044) 12.089,-15.044
GND on GND "GND" (solid, remove dead copper, pour order 29): -10.87,-53.88 ccw(c-8.87,-53.88) -8.87,-55.88 -8.87,-55.881 1.219,-55.881 26.503,-55.881 57.126,-55.881 ccw(c57.126,-53.881) 59.126,-53.881 59.126,-53.876 59.13,-53.876 59.13,75.46 ccw(c57.13,75.46) 57.13,77.46 -8.87,77.46 ccw(c-8.87,75.46) -10.87,75.46 -10.87,-53.88

## Keep-outs
Keep-Out Layer:
  lines w0.127: -8.874,-55.881 26.416,-55.881 26.416,-46.359 40.589,-46.359 40.589,-55.881 57.126,-55.881 ; -8.87,-55.88 cw(c-8.87,-53.88) -10.87,-53.88 -10.87,51.96 4.63,51.96 ccw(c4.63,52.46) 4.63,52.96 -10.87,52.96 -10.87,75.46 cw(c-8.87,75.46) -8.87,77.46 57.13,77.46 cw(c57.13,75.46) 59.13,75.46 ; 57.126,-55.876 ccw(c57.126,-53.876) 59.126,-53.876 ; 59.13,-53.88 59.13,51.96 43.13,51.96 cw(c43.13,52.46) 43.13,52.96 59.13,52.96 59.13,75.46 ; 59.13,75.46 59.13,75.46 ; 8.13,51.96 cw(c8.13,52.46) 8.13,52.96 27.13,52.96 cw(c27.13,52.46) 27.13,51.96 8.13,51.96 ; 31.75,51.96 cw(c31.75,52.46) 31.75,52.96 39.08,52.96 cw(c39.08,52.46) 39.08,51.96 31.75,51.96

## Other copper
Top Layer:
  rectangle net VIN: 8.718,39.573 11.049,41.681
  rectangle net VIN_5V: 34.036,58.115 36.322,59.512
  rectangle net +3V3_ST_LINK: 41.123,60.579 46.812,61.876
  rectangle net U5V: 43.256,56.286 49.428,58.42
  rectangle net NetC11_2: 49.708,59.182 52.603,60.554
  rectangle net E5V: 34.061,60.096 36.347,61.493
  rectangle net U5V: 34.061,56.109 36.347,57.506
  pour cut-out: 32.526,22.631 31.801,22.631 31.801,21.996 32.518,21.996
  pour cut-out: -0.178,-46.202 -0.178,-45.771 0,-45.771 0,-46.202
  pour cut-out: 26.639,-22.649 26.639,-23.02 26.848,-23.02 26.848,-22.657
  pour cut-out: 16.37,-22.623 16.37,-23.135 16.649,-23.135 16.649,-22.631
  pour cut-out: 16.37,-22.623 16.649,-22.623 16.649,-22.631 16.669,-22.631
  pour cut-out: 20.319,-19.09 20.319,-19.591 20.572,-19.591 20.572,-19.09
  pour cut-out: -4.177,-32.067 -3.613,-32.067 -3.613,-32.69 -4.166,-32.69
  pour cut-out: -0.925,18.524 -1.262,18.524 -1.784,18.002 -1.784,15.742 -1.519,15.742 -0.531,16.73
  pour cut-out: 19.855,17.101 18.27,17.101 17.697,16.528 17.697,15.16 18.059,15.265 19.845,16.681
  pour cut-out: 14.686,10.166 16.452,10.191 16.603,9.957 15.957,9.314 14.686,9.314
  pour cut-out: 20.175,11.157 17.459,8.441 17.862,7.962 20.87,10.969
  pour cut-out: 40.719,-6.7 40.719,-6.975 41.199,-6.975 41.199,-6.706
  pour cut-out: 25.629,-27.767 25.629,-38.176 35.171,-38.176 35.171,-27.762 35.128,-27.762
  pour cut-out: 0.978,27.678 0.978,27.178 1.417,27.178 1.417,27.686
  pour cut-out: 4.013,32.206 3.454,32.639 3.175,32.242 3.736,31.833
  pour cut-out: 51.613,-17.069 51.613,-17.612 52.222,-17.612 52.222,-17.069
  pour cut-out: 51.637,-19.456 51.637,-20 52.247,-20 52.247,-19.456
  pour cut-out: 43.053,55.093 43.053,55.27 42.787,55.27 42.787,55.093
  pour cut-out: 45.085,55.093 45.319,55.093 45.319,55.245 45.085,55.245
  pour cut-out: 50.169,53.65 50.317,53.65 50.317,53.289 50.165,53.289
  pour cut-out: 32.64,-41.75 32.624,-41.734 32.624,-41.516 32.765,-41.516 32.766,-41.517 32.766,-41.758
GND:
  pour cut-out: 25.629,-27.767 25.629,-38.176 35.171,-38.176 35.171,-27.762 35.128,-27.762
GND (Mid2):
  pour cut-out: 25.629,-27.767 25.629,-38.176 35.171,-38.176 35.171,-27.762 35.128,-27.762
Signal:
  pour cut-out: -3.404,0.762 -4.067,0.762 -4.067,0.051 -3.378,0.051
  pour cut-out: 22.893,31.61 22.375,31.61 22.375,30.874 22.867,30.874
  pour cut-out: -1.809,25.837 -2.667,25.837 -2.667,25.095 -1.827,25.095
  pour cut-out: -1.167,17.991 -1.167,17.374 -1.854,17.374 -1.854,17.991
  pour cut-out: 49.403,9.576 48.522,9.576 48.522,8.992 49.385,8.992
  pour cut-out: 25.629,-27.767 25.629,-38.176 35.171,-38.176 35.171,-27.762 35.128,-27.762
  pour cut-out: 28.9,27.828 28.9,27.21 28.213,27.21 28.213,27.828
  pour cut-out: 32.005,17.763 32.005,17.145 31.318,17.145 31.318,17.763
  pour cut-out: 39.879,14.283 39.879,13.665 39.192,13.665 39.192,14.283
  pour cut-out: 14.911,-14.47 14.911,-15.088 14.224,-15.088 14.224,-14.47
  pour cut-out: 7.472,-19.372 7.472,-19.99 6.785,-19.99 6.785,-19.372
  pour cut-out: 4.068,-16.959 4.068,-17.577 3.381,-17.577 3.381,-16.959
  pour cut-out: 4.09,-14.495 4.09,-15.113 3.404,-15.113 3.404,-14.495
  pour cut-out: -3.276,-17.619 -3.276,-18.237 -3.962,-18.237 -3.962,-17.619
  pour cut-out: 4.852,-40.403 4.852,-41.021 4.166,-41.021 4.166,-40.403
PWR:
  pour cut-out: 25.629,-27.767 25.629,-38.176 35.171,-38.176 35.171,-27.762 35.128,-27.762
Bottom Layer:
  pour cut-out: 39.185,-24.199 39.185,-24.779 39.827,-24.779 39.827,-24.181
  pour cut-out: -8.187,-6.147 -8.187,-6.625 -7.671,-6.625 -7.671,-6.139
  pour cut-out: 13.056,16.535 12.827,16.535 12.827,16.383 13.056,16.383
  pour cut-out: 4.604,-4.877 4.604,-5.586 5.455,-5.586 5.455,-4.877
  pour cut-out: 51.435,-17.048 52.197,-17.048 52.197,-17.704 51.435,-17.704
  pour cut-out: 41.072,-9.398 41.072,-9.614 41.275,-9.614 41.275,-9.398
  pour cut-out: 41.065,-6.407 41.072,-6.407 41.072,-6.622 41.275,-6.622 41.275,-6.401
  pour cut-out: 55.702,6.477 55.702,5.994 55.118,5.994 55.118,6.477
  pour cut-out: 9.144,-0.229 8.513,-0.229 8.513,-0.868 9.159,-0.868
  pour cut-out: 20.549,9.138 20.32,9.138 20.32,8.89 20.549,8.89
  pour cut-out: 3.469,3.542 4.355,3.542 4.355,1.792 3.463,1.792
  pour cut-out: 0.965,6.09 0.965,4.128 1.626,4.128 1.626,6.096
  pour cut-out: 30.486,9.627 30.486,9.873 30.66,9.873 30.66,9.627
  pour cut-out: 30.486,11.379 30.69,11.379 30.69,11.151 30.486,11.151
  pour cut-out: 25.629,-27.767 25.629,-38.176 35.171,-38.176 35.171,-27.762 35.128,-27.762

## Silkscreen, mask and mechanical layers (free items; w line width, h text height)
Top Overlay:
  drawing of 1964 lines, arcs and shapes, not listed
  text "USB PWR" at 31.902,77.064 h1.02 r270
  text "PWR-EXT" at 21.022,75.979 h1.02
  text "GND" at -5.766,74.066 h1.02 r270
  text "COM" at 46.203,73.812 h1.52 r270
  text "GND" at 53.035,73.659 h1.02 r270
  text "ST-LINK" at 3.226,71.755 h1.02 r270
  text "NUCLEO" at 11.024,71.755 h1.02 r270
  text "SWD" at -5.588,64.135 h1.02 r270
  text "TX" at 9.347,57.963 h1.02
  text "Over Current" at 53.01,56.617 h1.02
  text "RX" at 9.373,55.423 h1.02
  text "PWR" at 34.747,51.156 h1.02 r270
  text "User LEDs" at 10.942,49.53 h1.02
  text "E5V" at 33.63,46.101 h1.02
  text "U5V" at 36.652,46.101 h1.02
  text "VIN-5V" at 39.599,46.101 h1.02
  text "SCL" at 49.735,45.034 h1.14
  text "D15" at 49.835,43.663 h1.02
  text "Power Source" at 24.638,43.231 h1.02
  text "SDA" at 49.735,42.393 h1.14
  text "I2S_A" at 42.494,42.139 h1.02 r270
  text "D14" at 49.835,41.097 h1.02
  text "AVDD" at 49.835,38.989 h0.84
  text "USB_EN" at 7.954,37.414 h1.02
  text "GND" at 49.835,36.525 h1.02
  text "IDD" at 23.165,35.484 h1.02
  text "PG7" at 16.75,35.452 h1.02
  text "NC" at -3.282,35.179 h1.02
  text "SCK" at 49.733,35.128 h1.14
  text "IOREF" at -4.801,34.265 h1.02 r315
  text "D13" at 49.835,33.985 h0.89
  text "I2S_B" at 43.002,33.604 h1.02 r270
  text "MISO" at 49.733,32.766 h1.14
  text "NRST" at -4.775,31.75 h1.02 r315
  text "D12" at 49.835,31.674 h0.89
  text "SDMMC" at 4.877,31.496 h1.02 r270
  text "PWM" at 49.733,30.455 h1.14
  text "MOSI" at 49.733,29.566 h1.14
  text "3V3" at -3.988,28.702 h1.02 r315
  text "D11" at 49.835,28.499 h0.89
  text "PWM" at 49.733,27.407 h1.14
  text "SPI_B" at 42.697,26.594 h1.02 r270
  text "CS" at 49.733,26.467 h1.14
  text "D10" at 49.835,25.324 h0.89
  text "5V" at -3.277,24.943 h1.02
  text "PWM" at 49.733,24.054 h1.14
  text "GND" at -4.057,23.346 h0.97 r315
  text "D9" at 49.835,22.987 h0.89
  text "D8" at 49.835,21.133 h1.02
  text "GND" at -4.082,20.758 h0.97 r315
  text "IO" at 5.029,19.456 h1.02 r270
  text "D7" at 49.835,17.551 h1.02
  text "AVDD" at 40.538,17.475 h1.02
  text "VIN" at -3.393,17.297 h1.02
  text "PWM" at 49.735,15.82 h1.14
  text "AGND" at 40.432,14.91 h1.02
  text "D6" at 49.835,14.478 h1.02
  text "PWM" at 49.735,13.005 h1.14
  text "GND" at 41.443,12.344 h1.02
  text "A0" at -3.286,12.243 h1.02
  text "D5" at 49.835,11.811 h1.02
  text "A1" at -2.851,9.906 h1.02
  text "USART" at 4.318,9.779 h1.02 r270
  text "D4" at 49.835,9.677 h1.02
  text "ADC_IN" at 42.342,8.382 h1.02 r270
  text "PWM" at 49.735,7.899 h1.14
  text "A2" at -3.286,7.239 h1.02
  text "D3" at 49.835,6.604 h1.02
  text "A3" at -3.286,4.801 h1.02
  text "D2" at 49.835,4.572 h1.02
  text "TX" at 49.735,2.997 h1.14
  text "A4" at -3.335,2.286 h1.02
  text "D1" at 49.835,1.803 h1.02
  text "RX" at 49.735,0.311 h1.14
  text "A5" at -3.286,-0.305 h1.02
  text "GND" at 4.166,-0.483 h1.02
  text "D0" at 49.835,-0.94 h1.02
  text "COMP" at -3.607,-2.388 h1.02 r270
  text "QSPI" at 42.951,-3.962 h1.02 r270
  text "SAI_A" at 4.75,-4.394 h1.02 r270
  text "I2C" at -3.251,-9.449 h1.02 r270
  text "PA7" at 38.111,-9.804 h1.02 r270
  text "TIMER" at 50.749,-10.77 h1.02 r270
  text "SAI_B" at 4.902,-14.656 h1.02 r270
  text "GND" at -3.835,-14.707 h0.97 r315
  text "GND" at 41.443,-15.672 h1.02
  text "CAN" at -3.759,-17.805 h1.02 r270
  text "TIMER" at 42.151,-18.542 h1.02 r270
  text "PB13" at 38.227,-20.269 h1.02 r270
  text "IO" at -2.56,-23.52 h1.02
  text "IO" at 4.394,-23.571 h1.02
  text "MB1137 Rev B" at 41.237,-38.138 h1.02
  text "USB_FAULT" at 3.048,-39.7 h1.02
  text "VBUS" at 15.392,-39.7 h1.02
  text "www.st.com/stm32nucleo" at 24.841,-40.716 h1.52
  text "Ethernet" at 42.426,-45.974 h1.02 r270
  text "GND" at -7.976,-45.999 h1.27
  text "GND" at 53.01,-45.999 h1.27
  text "USER" at -4.826,-54.966 h1.02
  text "User USB" at 15.342,-54.966 h1.02
  text "RESET" at 49.327,-54.966 h1.02
Bottom Overlay:
  lines w0.076: 2.794,64.643 2.794,75.057 6.096,75.057 6.096,64.643 2.794,64.643 ; 8.89,64.643 12.446,64.643 12.446,75.057 8.89,75.057 8.89,64.643
  lines w0.127: 40.056,-18.466 40.615,-17.907 ; 43.764,14.173 43.84,14.173 ; 15.799,-36.576 33.579,-36.576 33.579,-31.877 15.799,-31.877 15.799,-36.576
  text "RESERVED" at 16.408,75.54 h1.02
  text "DEFAULT" at 5.461,75.489 h1.02
  text "SWO" at 29.792,61.963 h1.02
  text "TX" at 5.944,57.988 h1.02
  text "MCO" at 32.842,57.739 h1.02
  text "NRST" at 29.769,56.642 h1.02
  text "RST" at 23.24,56.451 h1.02
  text "RX" at 5.791,55.651 h1.02
  text "PC8" at 58.725,46.634 h0.71 r45
  text "PC11" at -1.333,45.288 h0.71
  text "PC9" at 52.095,45.263 h0.71
  text "PC6" at 58.877,44.196 h0.71 r45
  text "PC10" at -8.788,43.917 h0.71 r315
  text "PD2" at -1.778,42.748 h0.71
  text "PB8" at 52.095,42.723 h0.71
  text "PC12" at -8.788,41.808 h0.71 r315
  text "PC5" at 58.903,41.554 h0.71 r45
  text "VDD" at -9.195,40.234 h0.71 r315
  text "E5V" at -1.778,40.208 h0.71
  text "PB9" at 52.095,40.183 h0.71
  text "U5V" at 58.801,38.887 h0.71 r45
  text "GND" at -1.778,37.668 h0.71
  text "BT0" at -9.271,37.643 h0.71 r315
  text "AVDD" at 52.095,37.643 h0.71
  text "PD8" at 58.801,36.424 h0.71 r45
  text "NC" at -2.666,35.128 h0.71
  text "PF6" at -9.195,35.103 h0.71 r315
  text "GND" at 52.095,35.103 h0.71
  text "PA12" at 58.903,33.274 h0.71 r45
  text "+3V3" at -1.118,32.588 h0.71
  text "PA5" at 52.095,32.563 h0.71
  text "PF7" at -9.195,32.461 h0.71 r315
  text "PA11" at 58.623,30.531 h0.71 r45
  text "NRST" at -1.168,30.124 h0.71
  text "PA6" at 52.095,30.023 h0.71
  text "PA13" at -8.788,29.032 h0.71 r315
  text "PB12" at 58.725,28.016 h0.71 r45
  text "3V3" at -1.778,27.508 h0.71
  text "PA7" at 52.095,27.483 h0.71
  text "PA14" at -8.788,26.467 h0.71 r315
  text "PB11" at 58.776,25.502 h0.71 r45
  text "+5V" at -1.778,24.968 h0.71
  text "PB6" at 52.095,24.943 h0.71
  text "PA15" at -8.788,23.978 h0.71 r315
  text "GND" at 58.903,23.647 h0.71 r45
  text "GND" at -9.195,22.428 h0.71 r315
  text "GND" at -1.778,22.428 h0.71
  text "PC7" at 52.095,22.403 h0.71
  text "PB2" at 58.776,21.26 h0.71 r45
  text "GND" at -1.778,19.888 h0.71
  text "PB7" at -9.195,19.863 h0.71 r315
  text "PA9" at 52.095,19.863 h0.71
  text "PB1" at 58.623,18.567 h0.71 r45
  text "VIN" at -1.926,17.348 h0.71
  text "PA8" at 52.095,17.323 h0.71
  text "PC13" at -8.788,16.434 h0.71 r315
  text "PB15" at 58.725,15.494 h0.71 r45
  text "PB10" at 52.095,14.783 h0.71
  text "PC14" at -8.788,13.818 h0.71 r315
  text "PB14" at 58.776,12.878 h0.71 r45
  text "PA0" at -1.778,12.268 h0.71
  text "PB4" at 52.095,12.243 h0.71
  text "PC15" at -8.966,11.481 h0.71 r315
  text "PB13" at 58.928,10.465 h0.71 r45
  text "PA1" at -2.074,9.728 h0.71
  text "PB5" at 52.095,9.703 h0.71
  text "OSCI" at -8.788,8.763 h0.71 r315
  text "AGND" at 58.994,8.128 h0.71 r45
  text "PA4" at -1.778,7.188 h0.71
  text "PB3" at 52.095,7.163 h0.71
  text "OSCO" at -8.788,6.223 h0.71 r315
  text "MCO" at 27.711,5.918 h1.02 r90
  text "PC4" at 58.75,5.817 h0.71 r45
  text "PB0" at -1.778,4.648 h0.71
  text "PA10" at 52.095,4.623 h0.71
  text "VBAT" at -8.788,3.658 h0.71 r315
  text "PF5" at 58.852,3.429 h0.71 r45
  text "PC1" at -2.074,2.108 h0.71
  text "PA2" at 52.095,2.083 h0.71
  text "PC2" at -9.195,1.575 h0.71 r315
  text "PF4" at 58.801,0.838 h0.71 r45
  text "PC0" at -1.778,-0.432 h0.71
  text "PA3" at 52.095,-0.457 h0.71
  text "PC3" at -9.195,-1.016 h0.71 r315
  text "PE8" at 58.75,-1.626 h0.71 r45
  text "PD3" at -1.778,-2.972 h0.71
  text "PD4" at -9.271,-2.997 h0.71 r315
  text "GND" at 52.095,-2.997 h0.71
  text "PF10" at 59.004,-4.547 h0.71 r45
  text "PD5" at -9.296,-5.512 h0.71 r315
  text "PG2" at -1.778,-5.512 h0.71
  text "PD13" at 52.095,-5.537 h0.71
  text "PE7" at 58.801,-6.985 h0.71 r45
  text "PG3" at -1.778,-8.052 h0.71
  text "PD12" at 52.095,-8.077 h0.71
  text "PD6" at -9.296,-8.128 h0.71 r315
  text "PD14" at 58.953,-9.703 h0.71 r45
  text "PE2" at -1.778,-10.592 h0.71
  text "PD11" at 52.095,-10.617 h0.71
  text "PD7" at -9.347,-10.643 h0.71 r315
  text "PD15" at 58.801,-12.37 h0.71 r45
  text "PE4" at -1.778,-13.132 h0.71
  text "PE3" at -9.322,-13.157 h0.71 r315
  text "PE10" at 52.095,-13.157 h0.71
  text "PF14" at 58.852,-14.884 h0.71 r45
  text "GND" at -9.195,-15.443 h0.71 r315
  text "PE5" at -1.778,-15.672 h0.71
  text "PE12" at 52.095,-15.697 h0.71
  text "PE9" at 58.801,-16.916 h0.71 r45
  text "PF1" at -9.195,-17.145 h0.71 r315
  text "PF2" at -1.778,-18.212 h0.71
  text "PE14" at 52.095,-18.237 h0.71
  text "PH1" at -9.195,-18.491 h0.71 r315
  text "GND" at 58.801,-19.431 h0.71 r45
  text "PF0" at -9.195,-20.218 h0.71 r315
  text "PF8" at -1.778,-20.752 h0.71
  text "PE15" at 52.095,-20.777 h0.71
  text "PH0" at -9.195,-21.539 h0.71 r315
  text "PE11" at 58.928,-22.301 h0.71 r45
  text "PF9" at -1.778,-23.292 h0.71
  text "PE13" at 52.095,-23.317 h0.71
  text "PD1" at -9.195,-23.368 h0.71 r315
  text "PF3" at 58.877,-24.689 h0.71 r45
  text "PD0" at -9.195,-25.679 h0.71 r315
  text "PG1" at -2.074,-25.832 h0.71
  text "PF13" at 52.095,-25.857 h0.71
  text "PF15" at 58.953,-27.559 h0.71 r45
  text "GND" at -1.778,-28.372 h0.71
  text "PG0" at -9.246,-28.397 h0.71 r315
  text "PF12" at 52.095,-28.397 h0.71
  text "PF11" at 58.776,-30.175 h0.71 r45
  text "PE6" at -1.778,-30.912 h0.71
  text "PG14" at 52.095,-30.937 h0.71
  text "PE1" at -9.271,-30.963 h0.71 r315
  text "MB1137 Rev B" at 33.325,-31.369 h1.5
  text "PE0" at 58.801,-32.207 h0.71 r45
  text "PG15" at -1.037,-33.452 h0.71
  text "GND" at 52.095,-33.477 h0.71
  text "PG9" at -9.246,-33.528 h0.71 r315
  text "PG8" at 58.75,-34.696 h0.71 r45
  text "PG10" at -1.037,-35.992 h0.71
  text "PD10" at 52.095,-36.017 h0.71
  text "PG13" at -2.388,-36.373 h0.71 r90
  text "PG12" at -8.788,-37.008 h0.71 r315
  text "PG5" at 58.903,-37.389 h0.71 r45
  text "PH2" at -9.195,-38.506 h0.71 r315
  text "PG7" at 52.095,-38.557 h0.71
  text "PG6" at 58.877,-39.751 h0.71 r45
  text "PG11" at -2.362,-39.776 h0.71 r90
  text "PG4" at 52.095,-41.097 h0.71
  text "PD9" at -9.195,-41.224 h0.71 r315
Mechanical 1:
  lines w0.127: -10.87,-53.88 -10.87,51.96 4.63,51.96 ccw(c4.63,52.46) 4.63,52.96 -10.87,52.96 -10.87,75.46 cw(c-8.87,75.46) -8.87,77.46 57.13,77.46 cw(c57.13,75.46) 59.13,75.46 ; -10.866,-53.879 ccw(c-8.866,-53.879) -8.866,-55.879 ; -8.87,-55.88 57.13,-55.88 ; 57.13,-55.875 ccw(c57.13,-53.875) 59.13,-53.875 ; 59.13,-53.88 59.13,51.96 43.13,51.96 cw(c43.13,52.46) 43.13,52.96 59.13,52.96 59.13,75.46 ; 59.13,75.46 59.13,75.46 ; 8.13,51.96 cw(c8.13,52.46) 8.13,52.96 27.13,52.96 cw(c27.13,52.46) 27.13,51.96 8.13,51.96 ; 31.75,51.96 cw(c31.75,52.46) 31.75,52.96 39.08,52.96 cw(c39.08,52.46) 39.08,51.96 31.75,51.96
Drill Drawing:
  rectangle: 125.655,39.337 142.013,39.769
  rectangle: 125.675,42.27 142.032,42.702
  rectangle: 125.675,48.27 142.032,48.702
  rectangle: 125.675,51.828 142.032,52.26
  rectangle: 125.628,36.056 141.986,36.488
  rectangle: 125.655,45.337 142.013,45.769
  lines w0.127: -8.874,-55.881 26.416,-55.881 26.416,-46.359 40.589,-46.359 40.589,-55.881 57.126,-55.881 ; -8.87,-55.88 cw(c-8.87,-53.88) -10.87,-53.88 -10.87,51.96 4.63,51.96 ccw(c4.63,52.46) 4.63,52.96 -10.87,52.96 -10.87,75.46 cw(c-8.87,75.46) -8.87,77.46 57.13,77.46 cw(c57.13,75.46) 59.13,75.46 ; 57.126,-55.876 ccw(c57.126,-53.876) 59.126,-53.876 ; 59.13,-53.88 59.13,51.96 43.13,51.96 cw(c43.13,52.46) 43.13,52.96 59.13,52.96 59.13,75.46 ; 98.069,97.714 98.577,97.714 ; 59.13,75.46 59.13,75.46 ; 8.13,51.96 cw(c8.13,52.46) 8.13,52.96 27.13,52.96 cw(c27.13,52.46) 27.13,51.96 8.13,51.96 ; 31.75,51.96 cw(c31.75,52.46) 31.75,52.96 39.08,52.96 cw(c39.08,52.46) 39.08,51.96 31.75,51.96
  lines w0.178: 130.313,40.552 126.808,40.552 126.808,41.543 131.303,41.543 ; 130.313,46.552 126.808,46.552 126.808,47.543 131.303,47.543 ; 131.303,40.552 135.799,40.552 ; 131.303,46.552 135.799,46.552 ; 132.802,41.543 136.307,41.543 ; 132.802,47.543 136.307,47.543 ; 136.815,40.552 140.803,40.552 140.803,41.543 137.806,41.543 ; 136.815,46.552 140.803,46.552 140.803,47.543 137.806,47.543
  lines w0.203: 127.329,29.325 141.988,29.325 ; 127.329,31.421 141.968,31.421
  lines w0.254: 91.592,90.094 152.425,90.094 ; 91.592,92.634 142.291,92.634 152.451,92.634 152.451,92.659 ; 91.592,95.174 142.291,95.174 152.451,95.174 152.451,95.199 ; 103.784,87.605 103.784,97.714 ; 105.822,68.669 148.063,68.669 ; 111.912,87.605 111.912,97.714 ; 122.072,87.605 122.072,97.714 ; 126.511,49.695 140.911,49.695 ; 126.511,50.836 140.911,50.836 ; 126.641,43.354 141.041,43.354 ; 126.641,44.495 141.041,44.495 ; 126.941,37.454 141.341,37.454 ; 126.941,38.595 141.341,38.595 ; 142.291,87.605 152.451,87.605 152.451,97.714 142.291,97.714 ; 142.291,87.605 142.291,97.714 ; 142.291,87.605 91.592,87.605 91.592,97.714 142.291,97.714 ; 89.279,24.156 89.279,74.656 162.304,74.656 162.304,24.156 89.279,24.156
  text "IMPEDANCE TABLE" at 91.745,99.289 h1.25
  text "LAYER" at 93.599,95.809 h1.25
  text "WIDTH" at 105.232,95.809 h1.25
  text "Clearance" at 113.411,95.809 h1.25
  text "TOLERANCE" at 142.519,95.783 h1.25
  text "Differential Impedence" at 123.419,95.749 h1.25
  text "Layer1,6" at 93.599,93.548 h1.25
  text "5.1mil" at 104.953,93.218 h1.25
  text "9.9mil" at 114.605,93.167 h1.25
  text "100 OHM" at 127.102,93.167 h1.25
  text "+/- 10%" at 143.408,93.167 h1.25
  text "Layer1,6" at 93.599,90.712 h1.25
  text "90 OHM" at 127.279,90.712 h1.25
  text "+/- 10%" at 143.002,90.712 h1.25
  text "6.1mil" at 104.953,90.653 h1.25
  text "8.9mil" at 114.605,90.653 h1.25
  text "MB1137 B" at -5.766,78.156 h1.52
  text "LAYER STACK CONFIGURATION" at 112.123,69.537 h1.25
  text "6 LAYER BUILD" at 116.915,62.331 h1.25
  text "0.7mil" at 148.317,51.682 h1
  text "TOP LAYER" at 107.063,51.256 h1.25
  text "4mil" at 142.778,49.806 h1
  text "1.4mil" at 148.317,48.082 h1
  text "GND" at 107.063,47.879 h1.25
  text "13mil" at 142.778,46.582 h1
  text "MID LAYER 1" at 107.063,44.93 h1.25
  text "1.4mil" at 148.278,44.856 h1
  text "16.5mil" at 142.778,43.506 h1
  text "1.4mil" at 148.328,42.006 h1
  text "PWR" at 107.063,41.856 h1.25
  text "13mil" at 142.778,40.606 h1
  text "1.4mil" at 148.328,39.156 h1
  text "GND" at 107.063,39.056 h1.25
  text "4mil" at 142.778,37.556 h1
  text "0.7mil" at 148.328,36.006 h1
  text "BOTTOM LAYER" at 107.063,35.706 h1.25
  text "63mil" at 128.749,29.941 h1.25
  text "(plus soldermask thickness)" at 137.178,29.806 h1.25
  text "TOTAL BOARD THICKNESS: APPROX" at 96.209,29.792 h1.25
  text "Notes" at 121.229,20.353 h1.25
  text "Silkscreen color : Blue ink PANTONE 2955" at 126.67,17.297 h1.25
  text "Solder resist color : White" at 126.771,15.138 h1.25
  text ".Legend" at 94.081,-30.455 h1.52

## Dimensions
57.13,77.46 to 57.126,-55.881 on Drill Drawing
-10.87,-53.88 to 59.13,-53.88 on Drill Drawing

## Text inside footprints (layer, text, board x,y; h text height)
CN1: Mechanical 1 "Board edge" at 32.512,77.284 h0.2 r180
CN13: Mechanical 1 "Board edge" at 15.545,-55.744 h0.2